# Altium PCB B45160514D.PCBDOC (part 1 of 2)
Units mil, origin at the board's own origin, x right, y up, seen from the top; angles counter-clockwise.
Board outline 6000 x 4000 mil, 2 copper layers (Top Layer, Bottom Layer); 126 components, 91 nets, 371 pads, 466 vias.
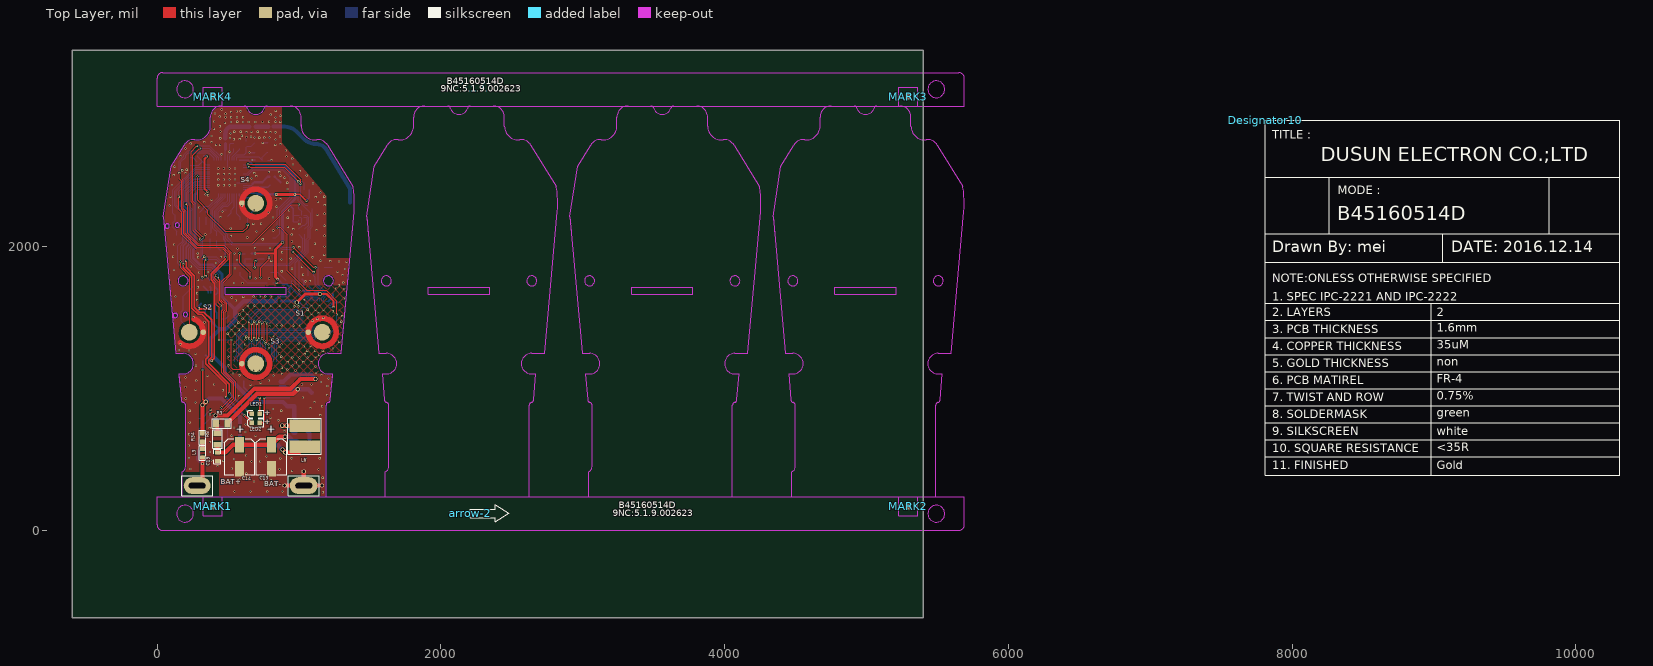
[diagram p0: Top Layer view]
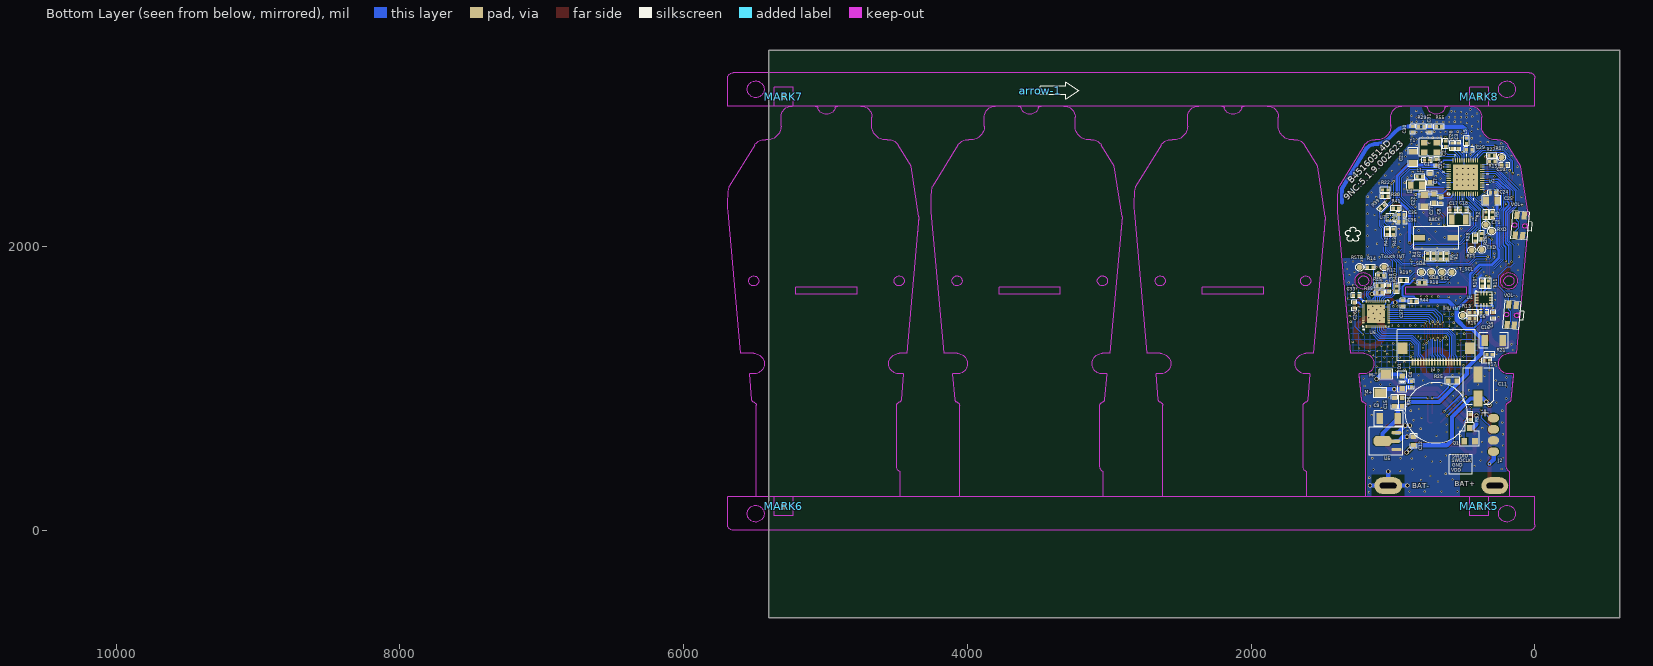
[diagram p1: Bottom Layer view, seen from below]

## Layer stack, top to bottom
Top Layer: signal copper 1.4
Dielectric: core 12.6, FR-4, Dk 4.8
Bottom Layer: signal copper 1.4

## Board outline
-599.3,-613.99 5400.7,-613.99 5400.7,3386.01 -599.3,3386.01

## Design rules (kind name [scope] priority, off if disabled: settings)
Clearance [All] p1: gap=5.91
ComponentClearance [All] p1: gap=0 collisioncheckmode=3 verticalgap=0
PolygonConnect [All] p1: connectstyle=Direct reliefconductorwidth=10 reliefentries=4 polygonreliefangle="90 Angle"
RoutingVias [All] p1: holewidth=28 width=50 viastyle="Through Hole" minholewidth=28 minwidth=50 maxholewidth=28 maxwidth=50
SolderMaskExpansion [All] p1: expansion=4
TestPointUsage [All] p1: valid=0 allowmultiple=FALSE
Testpoint [All] p1: side=15 testpointundercomponent=TRUE minsize=40 maxsize=100 preferedsize=60 minholesize=0 maxholesize=40 preferedholesize=32 testpointgrid=1 style=1023 order=0-112345678
Width [All] p1: maxlimit=100 minlimit=5.91 preferedwidth=6 toplayer_prefwidth=5.98 bottomlayer_prefwidth=5.98 minimp=50.000000 maximp=50.000000 favimp=50.000000
18 further rules are at their usual default settings.

## Components (designator, comment, footprint, x,y, rotation, side; value= is the part's Value field where it differs from the comment)
arrow-1 "Comment" 1-ARROW 3485,3100 r180 bottom
arrow-2 "Comment" 1-ARROW 2207,120.99 r0 top
BACK "SKQYACE010" SKQYACE010 695.59,2061.87 r0 bottom locked
BAT+ "TAP" BAT#1 282.2,316.28 r0 top
BAT- "TAP" BAT#2 1034.16,316.3 r0 top
C1 "20pF" C-0402 760,2610 r0 bottom
C2 "20pF" C-0402 630,2726 r90 bottom
C3 "NC" C-0402 539,2711 r90 bottom
C4 "1uF" C-0402 870,1030 r90 bottom
C5 "0.1uF" C-0402 295,1516.24 r270 bottom
C6 "0.1uF" C-0402 360,1536.24 r180 bottom
C7 "1uF" C-0603 739,2485 r270 bottom
C8 "0.1uF" C-0402 663,2326 r90 bottom
C9 "47uF/6.3V" C-1206 1030,790 r0 bottom
C10 "0.1uF/NC" C-0402 215,2575 r180 bottom
C11 "贴片铝电解电容100uF/10V,∮5*5.3,立隆,85C,VE" CAP_ALUM-C 400,1015 r90 bottom locked
C12 "0.1uF" C-0603 855,630 r90 bottom
C13 "贴片铝电解电容100uF/10V,∮5*5.3,立隆,85C,VE" CAP_ALUM-C 805,520 r270 top locked
C14 "贴片铝电解电容100uF/10V,∮5*5.3,立隆,85C,VE" CAP_ALUM-C 580,520 r270 top locked
C15 "0.1uF" C-0603 990,905 r90 bottom
C16 "100uF" C-1206 290,1340 r180 bottom
C17 "12pF" C-0402 579,2259 r0 bottom
C18 "12pF" C-0402 505,2259 r180 bottom
C19 "0.1uF" C-0603 425,520 r270 top
C20 "100pF" C-0402 582.01,2710.98 r90 bottom
C21 "0.1uF" C-0402 693,2595 r90 bottom
C22 "22uF" C-0805 780,2325 r90 bottom
C23 "22uF" C-0805 860,2630 r90 bottom
C24 "0.1uF" C-0402 295,2380 r0 bottom
C25 "22uF" C-0805 305,2325 r0 bottom
C26 "2.2uF" C-0402 1272,1586 r90 bottom
C27 "4.7uF" C-0603 711,2340 r270 bottom
C29 "0.8pF" C-0402 463,2685 r180 bottom
C30 "NC" C-0402 862,2827 r270 bottom
C31 "5.6nH" C-0402 740,2827 r270 bottom
C33 "2.2uF" C-0402 1260,1658 r0 bottom
C34 "2.2uF" C-0402 1033,1707 r90 bottom
C35 "0.1uF" C-0402 940.75,2227 r180 bottom
C36 "0.1uF" C-0402 940.75,2177 r0 bottom
C37 "2.2uF" C-0402 932,1601 r270 bottom
CTS "TAP" TS-1.0 345,2155 r90 bottom
D1 "1N4148WS-7-F" SOD-323 935,1045 r270 bottom
Designator10 "Comment" "PCB technical" 7810,2890 r0 top
"IMU INT" "TAP" TS-1.0 510,1516.24 r90 bottom (schematic designator INT1)
J2 "HEADER-4" PH-4-2.0 291.94,674.24 r270 bottom
J3 "HEADER-18" 0.5E-18PBX-P 695.57,1236.24 r0 bottom locked
L1 "15nH" R-0402 811,2493 r180 bottom
L3 "BLM18AG601SN1D" R-0603 320,545 r270 top
L4 "10uH" R-0805 836,2433 r0 bottom
L5 "3.9nH" R-0402 482,2746 r90 bottom
L6 "100uH CD53  600mA" FPI0503F-101M 1040,665 r90 top
LED1 "BLUE LT8AB3-51-UAE5/WR-PB1608UB-M28" LED-0603 695.59,821.69 r180 top locked
LED2 "RED INH-S1608BHR20TP-C" LED-0603 695.59,758.7 r180 top locked
M+ "TAP" TS-1.5*2 1090,970 r180 bottom
M- "TAP" TS-1.5*2 1050,1100 r180 bottom
MARK1 "MARK" MARK-3.0#1 393.7,169.31 r90 top (schematic designator MARK4)
MARK2 "MARK" MARK-3.0#1 5295.29,169.31 r90 top (schematic designator MARK4)
MARK3 "MARK" MARK-3.0#1 5295.3,3058.51 r270 top (schematic designator MARK4)
MARK4 "MARK" MARK-3.0#1 393.71,3058.51 r270 top
MARK5 "MARK" MARK-3.0#2 393.7,169.31 r180 bottom (schematic designator MARK4)
MARK6 "MARK" MARK-3.0#2 5295.29,169.31 r0 bottom (schematic designator MARK4)
MARK7 "MARK" MARK-3.0#2 5295.3,3058.51 r0 bottom (schematic designator MARK4)
MARK8 "MARK" MARK-3.0#2 393.71,3058.51 r180 bottom (schematic designator MARK4)
Q1 "S8050LT1" SOT-23 460,675 r90 bottom
R1 "10R" R-0402 620,1933 r90 bottom
R2 "10R" R-0402 345,2225 r270 bottom
R3 "2R" R-0805 455,755 r180 top
R4 "10R" R-0402 757,1933 r90 bottom
R5 "10R" R-0402 300,2225 r270 bottom
R6 "4.7k" R-0402 663,1933 r270 bottom
R7 "4.7k" R-0402 714,1933 r270 bottom
R8 "0R" R-0805 425,645 r270 top
R9 "1k" R-0402 455,800 r270 bottom
R10 "10R" R-0402 370,1740 r90 bottom
R11 "10R" R-0402 327,1740 r90 bottom
R12 "10R" R-0402 1085,1795 r180 bottom
R13 "0R" R-0402 440,1536.24 r180 bottom
R14 "10R" R-0402 1160,1855 r0 bottom
R15 "10R" R-0402 300,2600 r0 bottom
R16 "10R" R-0402 440,1491.24 r180 bottom
R17 "470K" R-0402 340,1195 r0 bottom
R18 "10R" R-0402 795,1745 r180 bottom
R19 "10R" R-0402 925,1765 r180 bottom
R20 "4.7k" R-0402 1055,2355 r180 bottom
R21 "470K" R-0402 320,1240 r0 bottom
R22 "4.7k" R-0402 1055,2400 r180 bottom
R25 "220R" R-0603 580,1055 r180 bottom
R26 "10R" R-0402 375,2075 r270 bottom
R27 "100K/NC" R-0402 305,2640 r180 bottom
R28 "10R" R-0402 420,2060 r270 bottom
R29 "0.5pF" R-0402 801,2846 r0 bottom
R34 "2R" R-0603 320,655 r270 top
R38 "470k" R-0402 1095,1676.24 r0 bottom
R39 "10R" R-0402 1075,2280 r135 bottom
R40 "10R" R-0402 975,1705 r90 bottom
R41 "1M" R-0402 979,2270 r0 bottom
R42 "10R" R-0402 1042,2106 r90 bottom
R43 "10R" R-0402 997,2106 r90 bottom
R44 "1R" R-0402 855,1616.24 r0 bottom
R45 "4.7k" R-0402 1095,1726.24 r180 bottom
R46 "1k" R-0603 935,905 r270 bottom
R55 "6.8nH" R-0402 676,2846 r0 bottom
RST "TAP" TS-1.0 235,2630 r90 bottom
RSTB "TAP" TS-1.0 1235,1855 r90 bottom
RTS "TAP" TS-1.0 445,1975 r90 bottom
RXD "TAP" TS-1.0 305,2110 r90 bottom
S1 "SW-PB" "K mat D5" 1164.08,1397.63 r0 top locked
S2 "SW-PB" "K mat D5" 227.09,1397.6 r180 top locked
S3 "SW-PB" "K mat D5" 695.57,1176.2 r0 top locked
S4 "SW-PB" "K mat D5" 695.57,2306.83 r0 top locked
SCL "TAP" TS-1.0 655,1820 r180 bottom
SDA "TAP" TS-1.0 730,1820 r180 bottom
T_SCL "TAP" TS-1.0 585,1820 r90 bottom
T_SDA "TAP" TS-1.0 800,1820 r90 bottom
"Touch INT" "TAP" TS-1.0 1063.02,1856.98 r90 bottom
TXD "TAP" TS-1.0 375,1980 r90 bottom
U2 "nRF52832" QFN-48-6*6-0.4 490,2490 r180 bottom locked
U4 "BMI160" LGA14 360,1631.24 r180 bottom
U5 "CE8401A30P" SOT89 1025,630 r90 bottom
U6 "IST3026B" uTQFN-42-4.5*4.5 1120,1526.22 r180 bottom locked
U7 "AK09911C" AK09911C 1018.75,2206 r180 bottom
VOL+ "SKSCLBE010" SKSCLBE010 107,2149.24 r95 bottom locked
VOL- "SKSCLBE010" SKSCLBE010 164,1519.24 r95 bottom locked
Y1 "32Mhz,12pF" XD3225-1-12M-125M 735,2700 r180 bottom
Y2 "32.768KHz,12.5pF" 32.768Khz-3215 536,2191 r180 bottom
? "Comment" 梅花 1282.95,2057.62 r180 bottom

## Footprints (in the part's own frame and the unit in brackets; to place one, negate y for a bottom-side part, rotate by r counter-clockwise, add the part's x,y. Pads: shape width x height; smd on the part's side, far side on the other; paste and mask are expansions set on the pad)
0.5E-18PBX-P [mm]
  rect 1.8x2 smd: 0(-6.05,-1.237) 0(6.05,-1.237)
  rect 0.3x1.25 smd: 1(-4.25,1.237) 2(-3.749,1.236) 3(-3.249,1.236) 4(-2.749,1.236) 5(-2.25,1.236) 6(-1.75,1.236) 7(-1.25,1.236) 8(-0.75,1.236) 9(-0.25,1.236) 10(0.25,1.236) 11(0.75,1.236) 12(1.249,1.237) 13(1.75,1.237) 14(2.25,1.237) 15(2.75,1.237) 16(3.25,1.237) 17(3.75,1.237) 18(4.25,1.237)
  silkscreen extent -7,-4.5 7,1
1-ARROW [mil]
  silkscreen extent 0,-60 270,60
32.768Khz-3215 [mm]
  rect 1x1.8 smd: 1(-1.25,0) 2(1.25,0)
  silkscreen extent -2,-1.1 2,1.1
AK09911C [mm]
  round 0.23 smd: A1(0.4,-0.4) A2(0,-0.4) A3(-0.4,-0.4) B1(0.4,0) B3(-0.4,0) C1(0.4,0.4) C2(0,0.4) C3(-0.4,0.4)
  silkscreen extent -0.7,-0.83 0.83,0.7
BAT#1 [mm]
  oval 4.8x3 hole 1 slot 3 at 0 deg: 1(0,0)
  silkscreen extent -2.79,-1.78 2.79,1.78
BAT#2 [mm]
  oval 5x3 hole 1 slot 3 at 0 deg: 1(0,0)
  silkscreen extent -2.79,-1.78 2.79,1.78
C-0402 [mil]
  rect 22x24 smd: 1(-19,0) 2(19,0)
  silkscreen extent -36,-18 36,18
C-0603 [mil]
  rect 30x35 smd: 1(-30,0) 2(30,0)
  silkscreen extent -51,-24 51,24
C-0805 [mil]
  rect 40x56 smd: 1(-40,0) 2(40,0)
  silkscreen extent -66,-34 66,34
C-1206 [mm]
  rect 1.2x1.95 smd: 1(-1.6,0) 2(1.6,0)
  silkscreen extent -2.62,-1.37 2.62,1.37
CAP_ALUM-C [mm]
  rect 2.8x1.6 smd: 1(-2.15,0) 2(2.15,0)
  silkscreen extent -3.25,-2.75 3.25,2.75
FPI0503F-101M [mm]
  rect 2.25x5.5 smd: 1(-1.875,0) 2(1.875,0)
  silkscreen extent -3.2,-3 3.2,3
"K mat D5" [mm]
  round 3 smd: 1(0,0)
  round 1 smd: 2(-2.5,0)
  Top Layer circle w1: c0,0 r2.5
LED-0603 [mm]
  rect 0.8x0.8 smd: 1(-0.7,0) 2(0.7,0)
  silkscreen extent -1.4,-0.69 1.4,0.69
LGA14 [mm]
  rect 0.675x0.25 smd: 1(-1.263,0.75) 2(-1.263,0.25) 3(-1.263,-0.25) 4(-1.263,-0.75) 8(1.263,-0.75) 9(1.263,-0.25) 10(1.263,0.25) 11(1.263,0.75)
  rect 0.25x0.675 smd: 5(-0.5,-1.013) 6(0,-1.013) 7(0.5,-1.013) 12(0.5,1.013) 13(0,1.013) 14(-0.5,1.013)
  silkscreen extent -1.5,-1.25 1.5,1.47
MARK-3.0#1 [mm]
  rect 1x1 smd: 1(0,0)
  rect 2.5x2.5 on Top Solder: 4(0,0)
  Keep-Out Layer lines w0.127: -1.7,1.7 -1.7,-1.7 1.7,-1.7 1.7,1.7 -1.7,1.7
MARK-3.0#2 [mm]
  rect 1x1 smd: 1(0,0)
  rect 2.5x2.5 on Bottom Solder: 4(0,0)
  Keep-Out Layer lines w0.127: 1.7,-1.7 -1.7,-1.7 -1.7,1.7 1.7,1.7 1.7,-1.7
"PCB technical" [mil]
  silkscreen extent 0,-2500 2500,0
PH-4-2.0 [mm]
  oval 1.524x2 smd: 1(-3,0) 2(-1,0) 3(1,0) 4(3,0)
QFN-48-6*6-0.4 [mm]
  rect 4.5x4.5 smd: 0(0,0)
  oval 0.2x0.8 smd: 1(-2.2,-3) 2(-1.8,-3) 3(-1.4,-3) 4(-1,-3) 5(-0.6,-3) 6(-0.2,-3) 7(0.2,-3) 8(0.6,-3) 9(1,-3) 10(1.4,-3) 11(1.8,-3) 12(2.2,-3) 25(2.2,3) 26(1.8,3) 27(1.4,3) 28(1,3) 29(0.6,3) 30(0.2,3) 31(-0.2,3) 32(-0.6,3) 33(-1,3) 34(-1.4,3) 35(-1.8,3) 36(-2.2,3)
  oval 0.8x0.2 smd: 13(3,-2.2) 14(3,-1.8) 15(3,-1.4) 16(3,-1) 17(3,-0.6) 18(3,-0.2) 19(3,0.2) 20(3,0.6) 21(3,1) 22(3,1.4) 23(3,1.8) 24(3,2.2) 37(-3,2.2) 38(-3,1.8) 39(-3,1.4) 40(-3,1) 41(-3,0.6) 42(-3,0.2) 43(-3,-0.2) 44(-3,-0.6) 45(-3,-1) 46(-3,-1.4) 47(-3,-1.8) 48(-3,-2.2)
  silkscreen extent -4.19,-4.19 4.19,4.19
R-0402 [mil]
  rect 22x24 smd: 1(-19,0) 2(19,0)
  silkscreen extent -36,-18 36,18
R-0603 [mil]
  rect 30x35 smd: 1(-30,0) 2(30,0)
  silkscreen extent -51,-24 51,24
R-0805 [mil]
  rect 40x56 smd: 1(-40,0) 2(40,0)
  silkscreen extent -66,-34 66,34
SKQYACE010 [mm]
  rect 2x1 smd: 1(-3,0) 2(3,0)
  silkscreen extent -4,-2 4,2
SKSCLBE010 [mm]
  rect 1.4x0.9 smd: 1(-1.8,-0.65) 2(1.8,-0.65) 3(-1.8,0.65) 4(1.8,0.65)
  Keep-Out Layer circle w0.127: c0,-0.9 r0.4
  Keep-Out Layer circle w0.127: c0,0.9 r0.4
  silkscreen extent -2.5,-2.1 2.5,1.45
SOD-323 [mm]
  rect 0.9x1 smd: 1(-1.1,0) 2(1.1,0)
  silkscreen extent -1.93,-0.8 1.84,0.8
SOT89 [mm] "SOT-89; Body 4.6 x 4.25 mm, inc. leads (LxW max)"
  oval 0.6x1.8 smd: 1(-1.5,-1.25) 2(0,-1.05) 3(1.5,-1.25)
  oct 1.8x3.3 smd: 2(0,1.25)
  silkscreen extent -2.5,-2.37 2.5,3.63
SOT-23 [mil]
  rect 45x40 smd: 1(-47.24,37.4) 2(-47.24,-37.4) 3(47.24,0)
  silkscreen extent -83,-69 83,69
TS-1.0 [mm]
  round 1 smd: 1(0,0)
  silkscreen extent -0.7,-0.7 0.7,0.7
TS-1.5*2 [mm]
  rect 2x1.5 smd: 1(0,0)
  silkscreen extent -1.2,-0.9 1.2,0.9
uTQFN-42-4.5*4.5 [mm]
  rect 0.4x0.15 on Bottom Overlay: 0(-2.8,-0.875) 0(-2.8,0.875) 0(2.8,-0.525) 0(2.8,1.225)
  rect 0.15x0.4 on Bottom Overlay: 0(-1.05,2.8) 0(-0.35,-2.8) 0(0.7,2.8) 0(1.4,-2.8)
  rect 3.3x3.3 smd: 0(0,0)
  rect 0.2x0.5 smd: 1(-1.75,-2.25)
  oval 0.2x0.5 smd: 2(-1.4,-2.25) 3(-1.05,-2.25) 4(-0.7,-2.25) 5(-0.35,-2.25) 6(0,-2.25) 7(0.35,-2.25) 8(0.7,-2.25) 9(1.05,-2.25) 10(1.4,-2.25) 11(1.75,-2.25) 22(1.75,2.25) 23(1.4,2.25) 24(1.05,2.25) 25(0.7,2.25) 26(0.35,2.25) 27(0,2.25) 28(-0.35,2.25) 29(-0.7,2.25) 30(-1.05,2.25) 31(-1.4,2.25) 32(-1.75,2.25)
  oval 0.5x0.2 smd: 12(2.25,-1.575) 13(2.25,-1.225) 14(2.25,-0.875) 15(2.25,-0.525) 16(2.25,-0.175) 17(2.25,0.175) 18(2.25,0.525) 19(2.25,0.875) 20(2.25,1.225) 21(2.25,1.575) 33(-2.25,1.575) 34(-2.25,1.225) 35(-2.25,0.875) 36(-2.25,0.525) 37(-2.25,0.175) 38(-2.25,-0.175) 39(-2.25,-0.525) 40(-2.25,-0.875) 41(-2.25,-1.225) 42(-2.25,-1.575)
  silkscreen extent -2.4,-2.93 2.4,2.4
XD3225-1-12M-125M [mm]
  rect 1.2x1 smd: 1(-1.15,-0.85) 2(1.15,0.85) 3(-1.15,0.85) 3(1.15,-0.85)
  silkscreen extent -2.04,-1.6 2.02,1.6
梅花 [mil]
  silkscreen extent -52,-20 52,82

## Part data
BACK: library part SW-PB
C1 C2 C3 C4 C7 C8 C10 C12 C15 C16 C19 C20 C21 C22 C23 C24 C25 C26 C27 C29 C30 C31 C33 C34 C37: library part CAP
C5 C6 C35 C36: library part Cap, "capacitor 27 pF NPO , +/- 2 %, SMD case 0603"
C9 C11 C13 C14: library part "CAP E"
C17 C18: library part CAP, "Capacitor"
D1: library part DIODE
J2: library part HEADER-6
J3: library part HEADER-16
L1 L3: library part Inductance
L4 L5: library part INDUCTOR
L6: library part INDUCTOR_Dup1
LED1 LED2: library part LED
Q1: library part NPN, "NPN型晶体管"
R1 R2 R3 R4 R5 R6 R7 R8 R9 R10 R11 R12 R13 R14 R15 R16 R17 R18 R19 R20 R21 R22 R25 R26 R27 R28 R29 R34 R38 R39 R40 R41 R42 R43 R44 R45 R46 R55: library part RES
U2: library part "BCM20735 60PIN QFN"
U5: library part CE8401A33P
VOL+ VOL-: library part SW-PB4
Y1: library part CRYSTAL4
Y2: library part CRYSTAL2

## Via types
v1: diameter 15, hole 10, Top Layer to Bottom Layer, tented both sides, 447 vias
v2: diameter 30, hole 20, Top Layer to Bottom Layer, tented both sides, 15 vias
v3: diameter 19.68, hole 11.81, Top Layer to Bottom Layer, tented both sides, 4 vias

## Nets (pads, with @x,y where several pads share a name; then routed paths per layer and width w, separated by ;. In a path a pad name is that pad's centre, name@x,y a point inside that pad or via, vN(x,y) a via of type N, cw(c..) or ccw(c..) an arc to the next point about the centre after c; other vN are vias at no path point)
3V: C5.1 C6.1 C9.1 C13.1 C14.1 C15.1 C16.1 C19.1 C21.1 C22.2 C23.1 C24.1 C25.1 C27.1 C35.1 C36.2 R6.1 R7.1 R8.2 R20.1 R22.1 R25.2 R27.1 R41.1 R44.1 R46.2 U2.13 U2.36 U2.48 U4.5 U4.8 U5.2 U7.A1 U7.C1 | length 6723.9
  Top Layer w10: v3(971,2369) 1006,2369 v1(1052,2323)
  Top Layer w12: v1(690,1952) 833.78,1952
  Top Layer w15: v1(295,1566) 300,1561 v1(380,1561) ; v1(351,2635) 334,2618 334,2409 v1(356.5,2386.5)
  Top Layer w19.68: v3@843.01,2369 v3(971,2369)
  Top Layer w20: v1(850,1772) 833.78,1788.22 833.78,1980.08 v3(883.7,2030)
  Top Layer w30: R8.2@425,605 C19.1@425,550 480,550 534.65,604.65 C13.1@805,604.65 861.35,661 v2(902,661)
  Bottom Layer w7.87: U2.48@608.11,2403.39 620.61,2403.39 629,2395
  Bottom Layer w8: C24.1@276,2375 276,2392 287.39,2403.39 U2.13@371.89,2403.39 ; v1(356.5,2386.5) U2.13@356.5,2402.89 ; C36.2@959.75,2177 989.75,2177 U7.A1@1003,2190.25 ; C35.1@965,2221.75 U7.C1@1003,2221.75
  Bottom Layer w9.84: U2.36@578,2608 642.91,2608.06 677.06,2573.98 C21.1@693,2574
  Bottom Layer w10: R27.1@324,2640 346,2640 v1(351,2635) ; v1(1052,2323) 1074,2345 R22.1@1074,2400
  Bottom Layer w12: 629,2395 648,2376 705,2376 C27.1@711,2370 ; R6.1@663,1952 R7.1@714,1952 ; 929.5,2297.5 957,2270 R41.1@960,2270 C36.2@960,2177.25
  Bottom Layer w15: C5.1@295,1535.24 295,1584 U4.8@310,1599 ; U4.5@379.68,1591.36 379.68,1476.55 433.38,1422.86 433.38,1409.8 ; R44.1@836,1616.24 836,1631.24 853,1648.24 924,1648.24 932.5,1656.74 932.5,1717.74 914.23,1736.01 886,1736.01 v1(850,1772)
  Bottom Layer w19.68: C21.1@693,2576 894,2576 971,2499 971,2337 883.7,2249.7 v3(883.7,2030) ; C27.1@711,2370 v3@839,2370
  Bottom Layer w20: C24.1@276,2375 268,2367 268,1990 255,1977 255,1920.7 302.71,1873 390.71,1873 458,1805.7 458,1649.24 551,1556.24
  Bottom Layer w30: R44.1@836,1616.24 611,1616.24 551,1556.24 551,1485.24 485,1419.24 442.82,1419.24 376,1352.42 376,1248.24 478,1146.24 478,1103 676,905 888,905 918,875 960,875 ; v2(902,661) 928,661 959,630 U5.2@983.66,630 ; 967.01,875 C9.1@967.01,790 1074.21,682.8 U5.2@1074.21,630
  other v3: 840.01,2369
AVDD: C37.1 R38.2 R44.2 R45.2 U6.21 U6.34 | length 653.1
  Top Layer w15: v2(1148,1666.24) 1194,1666.24 1242.23,1618.01 v1(1242.23,1574.47)
  Top Layer w20: v2(984,1606.24) 1044,1666.24 v2(1148,1666.24)
  Bottom Layer w6: R45.2@1076,1726.24 1076,1718.24 1114,1680.24 R38.2@1114,1676.24 ; U6.34@1208.58,1574.47 v1(1242.23,1574.47)
  Bottom Layer w7.87: 1002.76,1606.24 1006.76,1606.24 1024.75,1588.25 U6.21@1031.42,1588.23
  Bottom Layer w20: R44.2@874,1616.24 971.76,1616.24 981.76,1606.24 1002.76,1606.24 ; R38.2@1114,1676.24 1138,1676.24 v2(1148,1666.24)
BACK: BACK.2 U2.41 | length 886.4
  Bottom Layer w6: U2.41@608.11,2513.62 630.62,2513.62 673,2556.01 887,2556.01 951,2492 951,2346 864.7,2259.7 864.7,2091.7 834.87,2061.87 BACK.2@813.7,2061.87
BLUE: LED1.2 U2.17 | length 2040
  Top Layer w10: v1(205,1900) 205,1854.7 262.7,1797.01 262.7,1572.01 295.71,1539 329,1539 384,1484 384,1221.47 364,1201.47 364,1177 510.12,1030.88 v1(510.12,968.12) ; v1(638.16,840.09) 656.56,821.69 LED1.2@668.03,821.69
  Bottom Layer w8: 308.07,2466.38 U2.17@371.89,2466.38
  Bottom Layer w10: v1(205,1900) 205,1997 222.3,2014.3 222.3,2252.41 183,2291.7 183,2310.31 194.7,2322.01 194.7,2390.01 263.7,2459 300.7,2459 308.07,2466.38 ; v1(510.12,968.12) v1(638.16,840.09)
"COMP RST": R41.2 U2.16 U7.C2 | length 1498.2
  Top Layer w6: v1(203,2302) 217,2288 217,2093.84 288.84,2021.99 671.69,2021.99 946.69,2297 v1(999,2297)
  Bottom Layer w6: v1(203,2302) 208.7,2307.7 208.7,2384.01 269.2,2444.51 306.51,2444.51 312.63,2450.63 U2.16@371.89,2450.63
  Bottom Layer w8: v1(999,2297) 999,2269 1018.75,2249.25 U7.C2@1018.75,2221.75
GND: BACK.1 BAT-.1 C1.2 C2.2 C3.2 C5.2 C6.2 C7.1 C8.1 C9.2 C10.2 C11.2 C12.2 C13.2 C14.2 C15.2 C16.2 C17.2 C18.2 C19.2 C20.2 C21.2 C22.1 C23.2 C24.2 C25.2 C26.1 C27.2 C29.2 C30.2 C31.2 C33.2 C34.2 C35.2 C36.1 C37.2 J2.3 J3.0 J3.1 J3.18 Q1.2 R21.1 S1.2 S2.2 S3.1 S4.2 U2.0 U2.31 U2.45 U4.1 U4.6 U4.7 U5.1 U6.0@1120,1526.22 U6.20 U6.22 U7.A2 U7.B1 VOL+.1 VOL+.2 VOL-.1 VOL-.2 Y1.3 | length 1665.7
  Top Layer w30: v2(899,316.3) v2(1162.31,316.3) ; BAT-.1@1034.16,316.3 v2(1034.16,416.08)
  Bottom Layer w6: v1(460,2249) 470,2259 C18.2@486,2259 ; U2.0@497.87,2559.87 497.87,2646.87 511,2660 511,2723 518,2730 C3.2@539,2730 ; C17.2@598,2259 v1(598,2288) ; C2.2@630,2745 v1(630,2772) ; C1.2@779,2610 v1(806,2610) ; 1015.5,1574.47 U6.0@1062.77,1574.47 ; v1@1031,1625.24 1040.69,1625.24 U6.22@1051.1,1614.8 1051.1,1597.14 U6.0@1062,1586.24
  Bottom Layer w8: U2.0@561.37,2450.63 633.63,2450.63 ; U7.B1@1003,2206 1012,2206 1018.75,2199.25 1018.75,2168.25 1019,2168
  Bottom Layer w10: C6.2@340.32,1536.24 U4.7@340.32,1591.36 ; 360,1563.24 U4.6@360,1591.36 ; 374,1803 405,1772 405,1719 426,1698 426,1677 U4.1@409.72,1660.72 ; 1019,1775.24 1033,1761.24 C34.2@1033,1726
  Bottom Layer w12: v1(651,2663) Y1.3@686.19,2663 ; v1(668,2611) C21.2@690,2611 ; v1(745,2732) Y1.3@778.81,2732
  Bottom Layer w30: v2(899,316.3) v2(1162.31,316.3) ; BAT-.1@1034.16,316.3 v2(1034.16,416.08)
  other v1: 1169,269.24 776,274.24 546,275 658,275.24 883,275.24 516,340 683,345 802,355 582,359 1168,371.24 735,384 628,400 952,420 1138,430 863,432 234,433.24 527,436 427,454 666,486 726,487 465,491 383,494 543,504 868,508 1046,508 948,509 1146,509 225,510.24 772,522 627,528 372,553 224,598.24 372,623 694,667 525,668 226,678.24 624,694 897,700 805,717 371,721 542,727 624,748.24 230,762.24 855,777 799,794 1150,813 230,844 875,844 816,856 1080,862 1163,876 270,903 1109,905 202,930 1028,936 578,947 1198,954.24 464,988 272,991 200,1010.24 1199,1018.24 658,1026 1021,1029 402,1030 1088,1030 730,1040 1154,1046.24 276,1056 788,1056 1209,1072.24 200,1078.24 355,1090 820,1092 580,1094 1160,1095.24 880.7,1102 535,1106.01 1120,1110.24 680.7,1129 720.7,1129 975.31,1128.83 917,1135 879.14,1147.29 1000.25,1155.27 1117,1156.24 274,1161.24 955,1163.24 502,1165 978,1183.24 920.7,1187 1030.21,1187.07 1087,1186.86 1005,1219.24 953,1220.24 1059,1220.24 1116,1223.24 875,1224.24 502,1227 1142,1237.24 1040.7,1243 270,1245 860,1247.24 542,1266.01 1058,1266.01 1114,1266.01 1168,1266.01 225,1268 996,1271.24 154,1272 1240,1282 789,1285 862,1293 1034.16,1296.26 1080.7,1301 786,1310 877,1310 543,1311 620,1312 164,1313 998,1319 1284.06,1329.21 623,1345 802,1352 628,1365 825,1368 498,1387 549,1387 525,1412.24 577,1415 792,1440 549,1442.24 606,1443 960.7,1443 840.7,1444 879,1444 1008,1446 572,1464.24 334,1468 1298,1471 1095,1478 1129,1491 604,1495.24 1170.99,1498.84 1063.49,1501.35 256,1504 1305,1511.24 581,1524.24 638,1526.24 1089.06,1526.91 1138.03,1531.81 1239,1545.24 605.05,1552.02 1115.31,1554.53 1172,1555 1061.44,1555.86 968,1580.24 996,1580.24 1087,1581.24 1144,1581.24 640.7,1582.24 748,1582.24 804,1582.24 867,1582.24 687,1584.24 555,1620 1035,1623.24 282,1624 1317,1634.24 526,1642 607,1646 131,1648 681,1648.24 724,1648.24 762,1648.24 802,1648.24 282,1672 1318,1702.24 1262,1704.24 288,1714 1281,1728.24 602,1743 543,1744 1312,1747.24 1045,1757 1077,1758 288,1766 693,1775 790,1776 1308,1800.24 1029,1802 296,1819 358,1822 1272,1823 879,1827 119,1837 1325,1843 951,1845 549,1846 1022,1858 238,1861 416,1885 1336,1893 1282,1896 1220,1898 805,1900 1153,1901 563,1906 878,1911 942,1918 289,1926 1096,1926 450,1927 113,1929 1178,1942 287,1953 545,1953 881,1961 567,1988 691,1990 796,1992 1002,1997 1180,2002 120,2015 1112,2021 950,2037 745,2053 635,2065 520,2075 1180,2077 949,2085 339,2086 701,2108 819,2114 1124,2117 960,2124 519,2129 922,2140 1179,2148 1002,2160 678,2161 733,2162 921,2204 817,2205 448,2209 1130,2224 1180,2232 784,2242 931,2256 296,2276 842,2282 87,2290 1182,2293 1133,2316 384,2330 837,2333 869,2335 1118,2350 94,2351 1178,2352 360,2363 342,2367 1153,2381 918,2407 431.26,2433.26 470.63,2433.26 510,2433.26 549.37,2433.26 105,2434 1099,2447 917,2451 431.26,2472.63 470.63,2472.63 510,2472.63 549.37,2472.63 666,2482 899,2486 699,2498 869,2500 1055,2503 117,2505 431.26,2512 470.63,2512 510,2512 549.37,2512 201,2519 685,2519 788,2526 861,2526 1006,2533 209,2542 431.26,2551.37 470.63,2551.37 510,2551.37 549.37,2551.37 124,2564 958,2579 953,2621 912,2635 166,2639 455,2652 511,2669 908,2677 200,2692 416,2718 444,2718 833,2718 869,2723 237,2727 332,2737 384,2737 835,2755 541,2757 583,2758 445,2764 514,2765 720,2768 755,2769 791,2769 687,2770 662,2775 866,2777 383,2780 598,2782 518,2799 834,2807 629,2808 799,2808 665,2809 766,2809 544,2810 590,2810 709,2810 446,2812 400,2830 443,2849 478,2873 520,2879 606,2879 646,2879 692,2879 743,2880 868,2880 565,2881 790,2881 835,2881 402,2882 835,2911 482,2912 522,2912 563,2912 606,2912 442,2917 869,2923 801,2931 482,2937 408,2939 522,2949 562,2954 589,2955 836,2957 456,2967
I2C_SCL: R1.1 R6.2 R11.2 R43.1 U2.27 | length 2126.1
  Top Layer w6: v1(302,2693) 252,2643 252,2321 267.5,2305.5 267.5,2120.5 v1(323,2065) ; v1(319,1785) 319,1916 v1(332,1929)
  Bottom Layer w6: v1(302,2693) 369,2693 434.88,2627.12 U2.27@434.88,2608.11 ; R11.2@319,1760 v1(319,1785) ; v1(323,2065) 323,1938 v1(332,1929) 417,1929 466,1880 931.31,1880 1027,1975.7 1027,2057 R43.1@997,2087 ; 620,1881 R1.1@620,1914 R6.2@663,1914
I2C_SDA: R4.1 R7.2 R10.2 R42.1 U2.28 | length 2271.8
  Top Layer w6: v1(280,2711) 240,2671 240,2316 255,2301 255,2111 304,2062 v1(304,2052) ; v1(343,1793) 337,1799 337,1902.18 v1(346,1911.18) ; v1(688,1853) 688,1892 v1(694,1898)
  Bottom Layer w6: v1(280,2711) 369,2711 450.63,2629.37 U2.28@450.63,2608.11 ; v1(304,2052) 311,2045 311,1923 322.82,1911.18 416.69,1911.18 459.86,1868.01 937,1868.01 1039.38,1970.38 1039.38,2084.38 R42.1@1042,2087 ; v1(343,1793) 370,1766 R10.2@370,1759 ; v1(688,1853) 688,1867.18 ; v1(694,1898) 698,1898 R7.2@714,1914 R4.1@757,1914
"IMU INT": R13.1 U2.15 | length 1181.9
  Top Layer w6: v1(416,1797) 406.7,1787.7 406.7,1776.3 429.7,1753.3 429.7,1605.54 v1(450,1585.24)
  Bottom Layer w6: U2.15@371.89,2434.88 314.58,2434.88 312.2,2432.51 274.2,2432.51 220.7,2379.01 220.7,2274.3 236.83,2258.17 236.83,2002.91 223.83,1989.91 223.83,1907.79 289.79,1841.83 371.17,1841.83 v1(416,1797) ; v1(450,1585.24) 454,1581.24 454,1541.24 R13.1@459,1536.24
MOTOR: R9.1 U2.14 | length 1943.3
  Top Layer w6: v1(428,1779) 441.7,1765.3 441.7,1618.01 468,1591.7 468,1560.95 456,1548.95 456,1110 530,1036 530,942 v1(455,867)
  Bottom Layer w6: U2.14@371.89,2419.13 277.67,2419.13 233,2374.46 233,2278.92 248.83,2263.09 248.83,1997.94 235.83,1984.94 235.83,1912.77 294.77,1853.83 382.59,1853.83 433.09,1803.33 433.09,1784.09 v1(428,1779) ; R9.1@455,819 v1(455,867)
NetC3_1: C3.1 U2.32 | length 94.4
  Bottom Layer w8: U2.32@513.62,2608.11 513.62,2642.62 539,2668 C3.1@539,2692
NetC4_1: C4.1 D1.2 M+.1 R3.1 | length 832.4
  Top Layer w30: R3.1@495,755 703.75,963.75 959.75,963.75 v2(991,995)
  Bottom Layer w30: C4.1@870,1011 900.69,1011 916.69,995 1065,995 M+.1@1090,970
NetC4_2: C4.2 D1.1 M-.1 Q1.3 | length 1214.5
  Top Layer w30: v2(412,811) 497,811 685.75,999.75 942.5,999.75 1009.75,1067 v2(1117,1067)
  Bottom Layer w30: v2(412,811) 412,748 437.76,722.24 Q1.3@460,722.24 ; C4.2@870,1049 890.69,1049 941.69,1100 1084,1100 v2(1117,1067)
NetC7_2: C7.2 L1.2 U2.46 | length 208
  Bottom Layer w6: U2.46@608.11,2434.88 665.88,2434.88 673,2442
  Bottom Layer w16: 673,2442 686,2455 741,2455 779,2493 L1.2@792,2493
NetC8_2: C8.2 U2.1 | length 102.5
  Bottom Layer w10: U2.1@578,2371.89 578,2361 594,2345 C8.2@663,2345
NetC10_1: C10.1 R15.2 R27.2 U2.24 | length 211.6
  Bottom Layer w6: C10.1@234,2575 294,2575 R15.2@319,2600 ; R27.2@286,2640 286,2633 342.39,2576.61 U2.24@371.89,2576.61
NetC20_1: C20.1 U2.33 | length 105.7
  Bottom Layer w8: U2.33@529.37,2608.11 529.37,2635.37 582,2688 C20.1@582.01,2691.98
NetC26_2: C26.2 U6.33 | length 70.9
  Bottom Layer w6: U6.33@1208.58,1588.23 1224.01,1588.25 1233,1597.24
  Bottom Layer w15: 1233,1597.24 1242,1606.24 C26.2@1272,1606.24
NetC29_1: C29.1 L5.1 U2.30 | length 118.9
  Bottom Layer w8: U2.30@482.13,2608.11 C29.1@482.13,2685
  Bottom Layer w19.68: C29.1@482,2685 L5.1@482,2727
NetC31_1: C31.1 R29.1 R55.2 | length 87
  Bottom Layer w31.5: R55.2@695,2846 R29.1@782,2846
NetC33_1: C33.1 U6.32 | length 84.1
  Bottom Layer w6: U6.32@1188.9,1614.8 1208.58,1614.82
  Bottom Layer w15: 1208.58,1614.82 1240,1646.24 C33.1@1240,1666.24
NetC34_1: C34.1 R38.1 U6.25 U6.26 U6.27 U6.28 U6.29 | length 287.2
  Bottom Layer w6: U6.25@1092.44,1614.8 1092.44,1648.24 1128.76,1648.24 1147.56,1629.44 U6.29@1147.56,1614.8 ; U6.26@1106.22,1614.8 1106.22,1647.46 ; U6.27@1120,1614.8 1120,1647.24 ; U6.28@1133.78,1614.8 1133.78,1643.22
  Bottom Layer w20: C34.1@1033,1688 1064.24,1688 1080,1672.24 1080,1660.68 1092.44,1648.24
NetCTS_1: CTS.1 R2.2 | length 51
  Bottom Layer w6: CTS.1@345,2155 R2.2@345,2206
"NetIMU INT_1": "IMU INT.1" R16.1 | length 61.4
  Bottom Layer w6: R16.1@459,1491.24 485,1491.24 510,1516.24
NetL1_1: L1.1 L4.2 | length 55.7
  Bottom Layer w16: L1.1@830,2493 L4.2@869.35,2453.65
NetL3_1: L3.1 R34.2 | length 50
  Top Layer w30: L3.1@320,575 R34.2@320,625
NetL4_1: L4.1 U2.47 | length 193.6
  Bottom Layer w6: U2.47@608.11,2419.13 641.87,2419.13
  Bottom Layer w12: 641.87,2419.13 782.13,2419.13 L4.1@796,2433
NetL5_2: L5.2 R55.1 | length 227.2
  Bottom Layer w31.5: L5.2@482,2765 482,2799.2 cw(c529.8,2799.2) 496,2833 cw(c527.38,2801.62) 527.38,2846 R55.1@648,2846
NetL6_2: L6.2 U5.3 | length 272.4
  Top Layer w30: v2(882,738.82) L6.2@1040,738.82
  Bottom Layer w30: v2(882,738.82) v2(914,738.82) 963.76,689.06 U5.3@975.79,689.06
NetLED1_1: LED1.1 R25.1 | length 302.5
  Top Layer w10: LED1.1@723.15,821.69 v1(723.15,935)
  Bottom Layer w10: R25.1@610,1055 610,1010 685,935 v1(723.15,935)
NetLED2_1: LED2.1 R46.1 | length 380.9
  Top Layer w10: LED2.1@723.15,758.7 743.7,758.7 756,771 v1(756,935)
  Bottom Layer w10: v1(756,935) R46.1@935,935
NetQ1_1: Q1.1 R9.2 | length 187.8
  Bottom Layer w6: R9.2@455,781 484,781 497.4,767.6 Q1.1@497.4,627.76
NetR1_2: R1.2 SCL.1 | length 272.8
  Top Layer w6: v1(583,1952) 583,1888 655,1816 v1(655,1783)
  Bottom Layer w6: v1(583,1952) R1.2@620,1952 ; v1(655,1783) SCL.1@655,1820
NetR2_1: R2.1 U2.9 | length 182.1
  Bottom Layer w6: R2.1@344.02,2244.98 450.63,2351.59 U2.9@450.63,2371.89 ; R2.1@345,2244 R2.1@356,2244
NetR3_2: R3.2 R8.1 | length 74.1
  Top Layer w30: R3.2@415,755 425,745 R8.1@425,685
NetR4_2: R4.2 SDA.1 | length 255.2
  Top Layer w6: v1(730,1784) 730,1851 789,1910 v1(789,1924)
  Bottom Layer w6: v1(730,1784) SDA.1@730,1820 ; R4.2@757,1952 780,1952 789,1943 v1(789,1924)
NetR5_1: R5.1 U2.10 | length 198.8
  Bottom Layer w6: R5.1@300,2244 340,2284 365.69,2284 434.88,2353.19 U2.10@434.88,2371.89
NetR5_2: R5.2 RXD.1 | length 91
  Bottom Layer w6: RXD.1@300,2115 R5.2@300,2206
NetR10_1: R10.1 U4.14 | length 53.9
  Bottom Layer w10: R10.1@370,1721 379.68,1711.32 U4.14@379.68,1671.12
NetR11_1: R11.1 U4.13 | length 62.7
  Bottom Layer w10: R11.1@325.62,1719.62 360,1685.25 U4.13@360,1671.12
NetR12_2: "Touch INT.1" R12.2 | length 62
  Bottom Layer w6: R12.2@1066,1795 1066,1856.98
NetR13_2: R13.2 R16.2 U4.4 | length 115.1
  Bottom Layer w10: U4.4@409.72,1601.71 409.72,1547.52 R13.2@421,1536.24 R16.2@421,1491.24
NetR14_2: R14.2 RSTB.1 | length 56
  Bottom Layer w6: R14.2@1179,1855 RSTB.1@1235,1855
NetR15_1: R15.1 RST.1 | length 58.4
  Bottom Layer w6: RST.1@235,2630 251,2630 R15.1@281,2600
NetR18_1: R18.1 R39.1 U6.24 | length 961.8
  Top Layer w6: v1(841,1745) 950,1745 v1(1004,1691)
  Bottom Layer w6: R18.1@814,1745 v1(841,1745) ; U6.24@1078.66,1614.8 1078.66,1634.58 1061,1652.24 1018.76,1652.24 1002,1669 1002,1898.31 1064,1960.31 1064,2046 1078,2060 1078,2126.31 1095,2143.31 1095,2260 R39.1@1088.44,2266.57
NetR18_2: R18.2 T_SCL.1 | length 236.9
  Bottom Layer w6: T_SCL.1@585,1820 585,1794.7 634.71,1745 R18.2@776,1745
NetR19_1: R19.1 R40.1 U6.23 | length 229.3
  Bottom Layer w6: R19.1@944,1765 949,1760 949,1705 968,1686 R40.1@975,1686 975,1677.7 1012.7,1640.01 1055.23,1640.01 1064.88,1630.36 U6.23@1064.88,1614.8
NetR19_2: R19.2 T_SDA.1 | length 128.8
  Bottom Layer w6: T_SDA.1@800,1820 851,1820 R19.2@906,1765
NetR26_1: R26.1 U2.8 | length 315.7
  Bottom Layer w6: R26.1@375,2094 381.7,2100.7 381.7,2265.7 466.38,2350.38 U2.8@466.38,2371.89
NetR26_2: R26.2 TXD.1 | length 76
  Bottom Layer w6: TXD.1@375,1980 R26.2@375,2056
NetR28_1: R28.1 U2.7 | length 340.4
  Bottom Layer w6: R28.1@420,2079 420,2104 393.7,2130.3 393.7,2260.01 482.13,2348.43 U2.7@482.13,2371.89
NetR28_2: R28.2 RTS.1 | length 76.4
  Bottom Layer w6: R28.2@420,2041 420,2000 RTS.1@445,1975